# Altium PCB ESP32 With USB C 3rd PCB V1I1.PcbDoc (part 2 of 2)
Units mil, origin at the board's own origin, x right, y up, seen from the top; angles counter-clockwise.
Board outline 2700 x 1000 mil, 4 copper layers (L1, L2, L3, L4), stack 61.583 mil thick; 64 components, 73 nets, 299 pads, 161 vias.
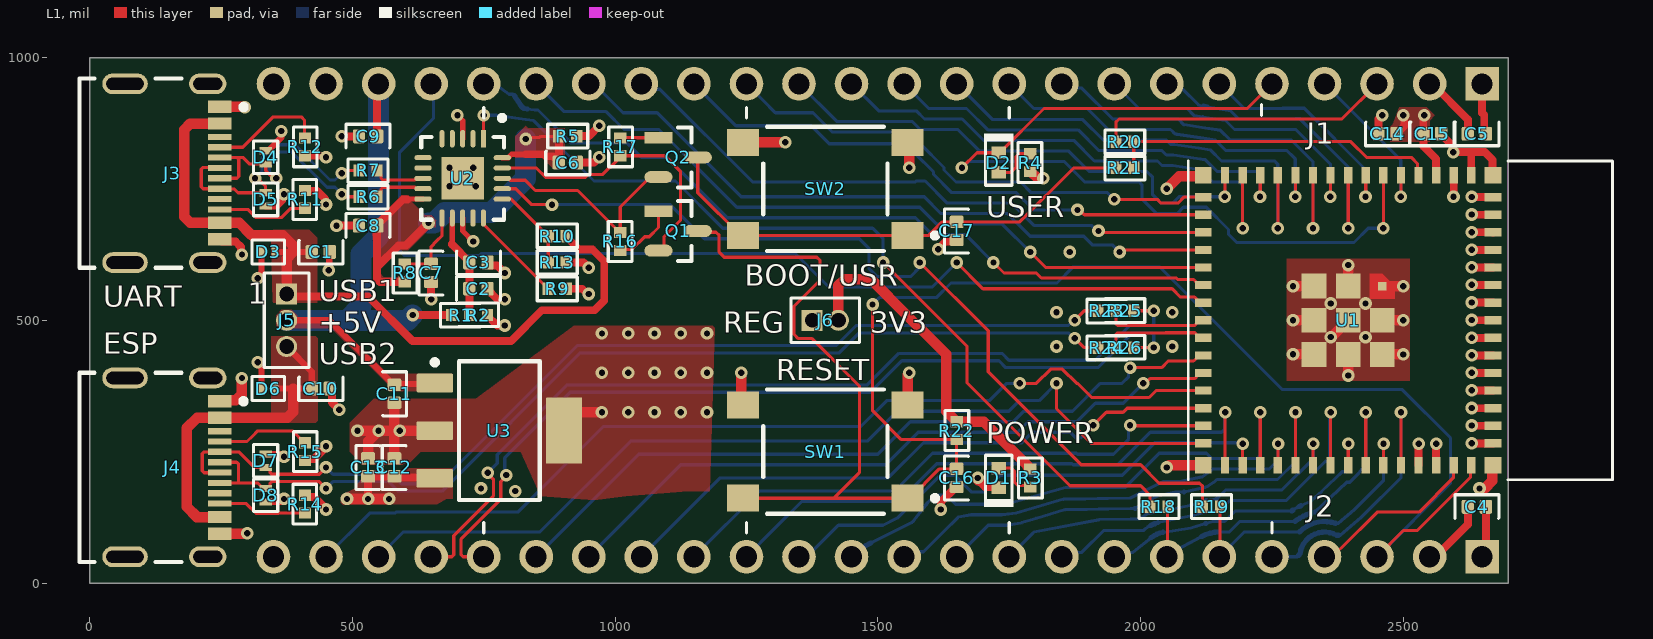
[diagram p0: L1 view]

## Via types
v1: diameter 24, hole 12, L1 to L4, tented both sides, 161 vias

## Nets (pads, with @x,y where several pads share a name; then routed paths per layer and width w, separated by ;. In a path a pad name is that pad's centre, name@x,y a point inside that pad or via, vN(x,y) a via of type N, cw(c..) or ccw(c..) an arc to the next point about the centre after c; other vN are vias at no path point) (continued)
GND: (continued)
  L1 w15: J3.B1A12 251.95,649.63 278.26,649.63 288.28,639.61 288.28,626.72 v1(290,625) ; R14.1 413.13,163.88 427.23,163.88 450,141.11 v1(450,140) ; R15.1 413.13,236.12 427.23,236.12 450,258.89 v1(450,260) ; R11.1 411.13,745.88 433.13,745.88 448.28,730.74 448.28,721.9 v1(450,720.18) ; R12.1 444.57,812.99 447.56,810 v1(450,810) ; C10.2 461.52,365.69 461.52,343.48 v1(475,330) ; v1(470,680) C8.2 ; v1(480,850) C9.2 ; v1(650,540) C7.2 ; C2.1 757.2,558.62 775.83,540 v1(790,540) ; C3.2 757.2,608.62 761.52,604.31 775.69,604.31 v1(790,590) ; R9.2 937.56,560 947.56,550 v1(950,550) ; R13.1 940,610 v1(950,600) ; C6.2 960,800 v1(970,810) ; v1(1615,635) 1615,636.13 1628.29,649.42 1646.62,649.42 C17.2 ; v1(1620,140) 1620,154.17 1648.62,182.8 C16.2 ; v1@1690.77,195.98 1703.72,183.03 D1.1@1728.27,183.03 ; C14.1 2452.8,882.8 v1(2460,890) ; U1.42 v1@2528.9,264.57 ; J2.2 2561.25,50 2622.8,111.54 C4.2 ; U1.43 v1@2562.36,264.57 ; C15.2 2572.2,853.62 2595,830.83 v1(2595,820) 2625,820 ; v1@2595.83,735.43 U1.2 ; U1.1 2629.29,815.71 2625,820 ; v1(2630.04,667.76) 2630.26,667.54 2670.41,667.54 U1.58 ; v1@2630.47,265.75 U1.46 ; v1@2630.47,299.21 U1.47 ; v1@2630.47,332.68 U1.48 ; v1@2630.47,366.14 U1.49 ; v1@2630.47,399.61 U1.50 ; v1@2630.47,433.07 U1.51 ; v1@2630.47,466.54 U1.52 ; v1@2630.47,500 U1.53 ; v1@2630.47,533.46 U1.54 ; v1@2630.47,566.93 U1.55 ; v1@2630.47,600.39 U1.56 ; v1@2630.47,633.86 U1.57 ; v1@2630.47,700.79 U1.59 ; v1@2630.47,734.25 U1.60 ; v1(2645,180) 2646.72,181.72 v1@2656.72,181.72 ; J1.1 2650,894.54 2653.85,890.69 2653.85,858.35 C5.2 ; U1.65@2669.25,223.03 U1.65 ; U1.62 2669.95,776.27 2669.95,805.05 2655,820 2625,820
  L1 w20: J4.B1A12 299.09,94.09 v1(300,95) ; J4.A1B12 249.45,347.87 278.28,347.87 290,359.59 v1(290,390) ; J3.A1B12 294.09,905.91 v1(295,905) ; v1(510,290) v1(550,290) ; C13.1 530,270 v1(550,290) ; C12.1 580,278.92 ; 580,301.08 C11.1 ; U3.2 v1(590,290) v1(550,290) ; U3.4 903.03,300.55 927.48,325 v1(975,325) ; v1(1240,400) 1240,342.09 SW1.4 ; SW2.4 v1(1323.58,838.58) ; SW1.3 1556.5,396.5 v1(1560,400) ; SW2.3 1560,835.08 v1(1560,790) ; v1(1690,200) 1690.77,199.23 v1@1690.77,195.98 ; D1.1@1728.27,183.03 D1.1 ; v1(2050,220) 2054.41,224.41 U1.64 ; v1(2050,750) 2073.7,773.7 2117.56,773.7 U1.63 ; v1(2290,435.08) U1.73@2330.04,435.08 ; v1(2290,500.04) U1.72@2330.04,500.04 ; v1(2290,565) 2330.04,565 U1.71 ; v1(2362,468) 2363.04,468 U1.61 ; v1(2395,394.96) U1.70 ; U1.69@2395.08,565 v1(2395.08,605.04) ; U1.68 v1(2500.08,435) ; U1.67 v1(2500.08,499.96) ; U1.66@2460.04,564.92 v1(2500.08,564.92) ; v1@2656.72,181.72 2669.25,194.25 U1.65@2669.25,223.03
  other v1: 810,175 745,180 2529.33,265 2562.8,265 2630.04,266.18 2630.04,299.65 1025,325 1075,325 1125,325 1175,325 2630.04,333.11 2630.04,366.57 975,400 1025,400 1075,400 1125,400 1175,400 2630.04,400.04 2630.04,433.5 1840,450 2060,450 2630.04,466.97 2428,468 975,475 1025,475 1075,475 1125,475 1175,475 2630.04,500.43 1840,515 2060,515 2362,532 2428,532 2630.04,533.9 2630.04,567.36 2630.04,600.83 1865,630 2630.04,634.29 2630.04,701.22 2595.39,735 2630.04,734.69 685,755 735,755 685,790 730,790
GPIO0: R20.2 R21.2 U1.4 | length 630.6
  L1 w6: R21.2 R20.2 2400,840 2430,810 2515,810 2526.74,798.26 2526.74,777.75 U1.4
GPIO1: J1.4 U1.5 | length 315.8
  L1 w6: v1(2495,735) 2495.43,735.43 U1.5
  L4 w6: J1.4 2495,805 v1(2495,735)
GPIO2: D2.1 J1.5 U1.6 | length 1669.8
  L1 w6: v1(1660,790) 1688.7,818.7 D2.1 1731.97,818.7 1816.27,903 2203,903 J1.5 ; v1@2461.97,675.04 U1.6
  L4 w6: v1(1660,790) 1660.5,790 1672.86,802.36 1854.36,802.36 1893.72,763 1997.14,763 2003,757.14 2003,730.53 2030.53,703 2069.47,703 2081.47,715 2125,715 2167.21,672.79 2167.21,663.82 2183.03,648 2406.18,648 2433.18,675 v1(2461.93,675)
GPIO3: J1.6 U1.7 | length 438.2
  L1 w6: v1@2428.5,735.43 U1.7
  L4 w6: J1.6 2197,903 2269.47,903 2270.02,903.56 2311.44,903.56 2428.07,786.93 v1(2428.07,735)
GPIO4: J1.7 U1.8 | length 624.8
  L1 w6: v1(2395,675) v1(2395,675) U1.8
  L4 w6: J1.7 2060.33,939.67 2080.33,939.67 2108.48,911.52 2110.53,909.47 2113.36,908.84 2119.53,907.45 ; 2127.56,905.92 2167.57,899.71 2170.79,899.21 2187,883 2277.75,883 2294.88,883.56 2303.16,883.56 2306.09,880.63 2395,791.72 v1(2395,675)
  L4 w10: 2119.53,907.45 ccw(c2146.23,1026.12) 2127.56,905.92
GPIO5: J1.8 U1.9 | length 573.8
  L1 w6: v1@2361.57,735.43 U1.9
  L4 w6: J1.8 1994.07,905.93 1997,903 2088.72,903 2102.24,889.47 2118.18,887.14 2161.27,880.45 2163.58,878.14 2178.72,863 2295.43,863 2358.21,800.22 2361.14,797.29 v1(2361.14,735)
GPIO6: J1.9 U1.10 | length 763.1
  L1 w6: v1(2328.07,675) U1.10
  L4 w6: J1.9 1858.23,941.77 1888.23,941.77 1947,883 2071.56,883 2082.39,872.18 2116.64,867.14 2151.75,861.69 2170.43,843 2286.59,843 2289.52,840.07 2328.07,801.52 v1(2328.07,675)
GPIO7: J1.10 U1.11 | length 711.7
  L1 w6: v1@2294.65,735.43 U1.11
  L4 w6: J1.10 1797,903 1898.72,903 1938.72,863 2057,863 2059.93,860.07 2063.22,856.78 2065.56,854.44 2068.84,853.96 2113.66,847.36 2142.22,842.92 2162.15,823 2278.31,823 2291.28,810.02 2294.21,807.09 v1(2294.21,735)
GPIO8: J1.11 U1.12 | length 893.7
  L1 w6: v1@2261.18,675.04 U1.12
  L4 w6: J1.11 1717.64,882.36 1889.36,882.36 1928.72,843 2048.72,843 2057.28,834.44 2064.1,834.44 2110.65,827.59 2132.7,824.16 2153.86,803 2255.28,803 2258.21,800.07 2261.14,797.14 v1(2261.14,675)
GPIO9: J1.12 U1.13 | length 828.1
  L1 w6: v1@2227.72,735.43 U1.13
  L4 w6: J1.12 1597,903 1668.72,903 1709.36,862.36 1881.07,862.36 1920.43,823 2040.43,823 2048.99,814.44 2062.63,814.44 2107.67,807.81 2123.17,805.4 2145.58,783 2221.43,783 2224.35,780.07 2227.28,777.14 v1(2227.28,735)
GPIO10: J1.13 U1.14 | length 1004.1
  L1 w6: v1@2194.25,675.04 U1.14
  L4 w6: J1.13 1501.64,898.36 1573.36,898.36 1588.72,883 1660.43,883 1701.07,842.36 1872.79,842.36 1912.15,803 2032.15,803 2040.71,794.44 2061.17,794.44 2104.69,788.03 2113.65,786.64 2137.29,763 2188.35,763 2191.28,760.07 2194.21,757.14 v1(2194.21,675)
GPIO11: J1.14 U1.15 | length 968.9
  L1 w6: v1@2160.79,735.43 U1.15
  L4 w6: J1.14 1421.64,878.36 1565.07,878.36 1580.43,863 1652.15,863 1692.79,822.36 1862.64,822.36 1902,783 2012,783 2023,772 2023,738.82 2038.82,723 2061.18,723 2073.18,735 v1(2160.35,735)
GPIO12: J1.15 U1.16 | length 974.7
  L1 w6: v1(1950,730) 2031.82,730 2038.82,723 2071.22,723 2082.48,734.25 U1.16
  L4 w6: J1.15 1258.23,941.77 1264.75,941.77 1267.68,938.84 1267.64,938.8 1267.64,932.36 1280.65,919.35 1305,895 1376.72,895 1413.36,858.36 1529.83,858.36 1532.25,855.93 1559.22,855.93 1578.15,837 1579.47,837 1625.86,790.61 1625.86,785.96 1648.82,763 1772,763 1792,743 1937,743 v1(1950,730)
GPIO13: J1.16 U1.17 | length 1075.4
  L1 w6: v1(1880,710) 1883.79,710 1893,700.79 U1.17
  L4 w6: J1.16 1230,870 1373.43,870 1407.5,835.93 1550.93,835.93 1569.86,817 1571.18,817 1605.86,782.33 1605.86,777.67 1640.53,743 1763.72,743 1796.72,710 v1(1880,710)
GPIO14: J1.17 U1.18 | length 1188.2
  L1 w6: v1(1920,670) 1922.68,667.32 U1.18
  L4 w6: J1.17 1060.33,939.67 1085.33,939.67 1262,763 1571.18,763 1573.18,765 1590,765 1632,723 1755,723 1798,680 1907.14,680 1917.14,670 v1(1920,670)
GPIO15: J1.18 U1.19 | length 1303.6
  L1 w6: v1(1960,630) 1963.86,633.86 U1.19
  L4 w6: J1.18 960,950 1015.03,894.97 1080.03,894.97 1081.26,893.74 1240,735 1588.28,735 1620.28,703 1746.72,703 1789.72,660 1891.82,660 1908.82,643 1947,643 v1(1960,630)
GPIO16: J1.19 U1.20 | length 1414.3
  L1 w6: v1(1790,630) 1819.61,600.39 U1.20
  L4 w6: J1.19 903,897 983,897 1017,863 1083.72,863 1231.72,715 1580,715 1612,683 1737,683 v1(1790,630)
GPIO17: J1.20 U1.21 | length 1528
  L1 w6: v1(1720,610) 1740,590 1801.72,590 1811.32,580.39 2067.89,580.39 2070.76,577.52 2100.98,577.52 2108.7,569.8 2116.57,569.8 U1.21
  L4 w6: J1.20 757.78,951 769.88,951 798.56,930 805.68,930 808.6,927.07 809.47,926.21 ; 822.58,906.22 823.13,905.66 ; 827.74,903.04 831.4,902.11 832.78,901.92 846.4,900 853.28,900 916.28,837 1023,837 1050,810 1098.28,810 1213.28,695 1571.72,695 1603.72,663 1667,663 v1(1720,610)
  L4 w10: 809.47,926.21 ccw(c1016.65,1047.81) 822.58,906.22 ; 823.13,905.66 ccw(c830.2,912.74) 827.74,903.04
GPIO18: J1.21 U1.22 | length 1959.7
  L1 w6: v1(1650,610) 1700,560 2060,560 2075.94,544.06 2102.84,544.06 2108.7,538.2 2108.7,536.34 2111.57,533.46 U1.22
  L4 w6: J1.21 654.47,945.53 654.47,884.47 590,820 590,650 590,632.86 599.86,623 741.18,623 745.18,627 1343,627 1407,563 1603,563 1603.33,563.33 v1(1650,610)
GPIO21: J2.19 U1.25 | length 1436.8
  L1 w6: v1(1980,410) 2040,410 2052.48,422.48 2100.98,422.48 2108.7,430.2 2116.57,430.2 U1.25
  L4 w6: J2.19 1045,245 1500,245 1562,307 1757.4,307 1777.4,327 1870.53,327 1923.53,380 1964.75,380 1977.32,392.58 1977.32,407.32 v1(1980,410)
GPIO26: J2.18 U1.26 | length 1315.3
  L1 w6: v1(2005,380) 2008.79,380 2017.8,389.02 2102.84,389.02 2108.7,394.87 2108.7,396.73 2111.57,399.61 U1.26
  L4 w6: J2.18 1125,225 1515,225 1577,287 1765.68,287 1785.68,307 1878.82,307 1913.98,342.16 1967.16,342.16 v1(2005,380)
GPIO33: J2.17 U1.28 | length 1195.9
  L1 w6: v1(1910,300) 1935,325 1966.82,325 1974.49,332.68 U1.28
  L4 w6: J2.17 1105,105 1200,200 1520,200 1587,267 1773.96,267 1793.96,287 1866.04,287 1877.38,275.66 1885.66,275.66 v1(1910,300)
GPIO34: J2.16 U1.29 | length 1088.7
  L1 w6: v1(1980,300) 1980.79,299.21 U1.29
  L4 w6: J2.16 1274.85,174.85 1531.82,174.85 1603.96,247 1877.75,247 1879.75,245 1948.43,245 1977.32,273.89 1977.32,297.32 v1(1980,300)
GPIO35: J2.15 U1.31 | length 1145.3
  L1 w6: U1.31 v1(2160.83,325)
  L4 w6: J2.15 1301.17,101.17 1354.85,154.85 1455.09,154.85 1540.1,154.85 1543.03,157.78 1612.25,227 1869.47,227 1871.47,225 1956.72,225 2018.72,287 2154.14,287 2160,292.86 2160,324.17 v1(2160.83,325)
GPIO36: J2.14 U1.32 | length 999.6
  L1 w6: U1.32 v1@2194.25,264.57
  L4 w6: J2.14 1365,50 1425,110 1509.79,110 1536.99,123.46 1618.53,205 1646.82,205 1678.82,173 1701.18,173 1733.18,205 1965,205 2027,267 2192.69,267 v1(2194.69,265)
GPIO37: J2.13 U1.33 | length 1050.6
  L1 w6: U1.33 v1@2227.72,324.96
  L4 w6: 1486.39,76.11 1564.7,114.85 1566.09,116.24 1568.21,118.66 1594.58,152.76 1608.82,167 1631.18,167 1648.18,150 1728.3,150 1738.97,153 1755.1,153 1856.9,181.62 1970,181.62 2035.38,247 2125.36,247 2135.36,237 2221.9,237 2227.76,242.86 v1(2227.76,325) v1@2230,322.76
  L4 w10: J2.13 cw(c1547.58,-47.58) 1486.39,76.11
GPIO38: J2.12 U1.34 | length 839.2
  L1 w6: U1.34 v1@2261.18,264.57
  L4 w6: J2.12 1559.46,59.46 1587.01,59.46 1626.84,99.28 1650.91,123.36 1653.13,125.57 1677.67,130 1736.58,130 1763.39,133 1853.18,159.46 1980.89,161.62 2041.21,191.94 2043.33,193 2074.43,193 2117.51,202.28 2132.41,212.46 2136.95,217 2245,217 2261.61,233.61 v1(2261.61,265)
GPIO39: J2.11 U1.35 | length 895.2
  L1 w6: U1.35 v1@2294.65,324.96
  L4 w6: J2.11 1710,110 1744.87,110 1772.57,113.9 1773.93,115.26 1800.87,123.19 1856.23,139.51 1981.06,141.62 1985.63,141.62 1989.31,141.76 ; 1989.33,141.77 2006.68,152.17 2007,152.36 2034.83,166.34 2065.72,173 2082.72,173 ; 2082.73,173 2123.65,182.28 2127.49,183.97 2140.7,192.46 2145.24,197 2260.58,197 2294.69,231.11 v1(2294.69,325)
GPIO40: J2.10 U1.36 | length 707
  L1 w6: U1.36 v1@2328.11,264.57
  L4 w6: J2.10 1794.94,94.94 1797.12,97.12 1921.05,120.46 1921.88,120.62 1981.23,121.62 1993.92,121.62 1997.6,121.76 2011.9,131.31 2094.47,147.89 2097.69,148.58 2097.87,148.63 2123.16,155.03 2125.12,157 ; 2125.13,157 2144.64,159.93 2144.79,160.08 2161.72,177 2268.86,177 2328.54,236.68 v1(2328.54,265)
GPIO41: J2.9 U1.37 | length 767.6
  L1 w6: U1.37 v1(2361.61,325)
  L4 w6: J2.9 1858.23,58.23 1888.23,58.23 1930,100 2005.28,100 2008.03,102.23 2013.33,106.52 2019.54,109.68 ; 2027.15,112.98 2033.17,115.18 ; 2033.2,115.18 2098.53,128.31 2102.24,129.1 2133.41,137 2150,137 2170,157 2277.15,157 2351.79,231.64 2354.14,231.64 2360,237.5 2360,323.39 v1(2361.61,325)
  L4 w10: 2019.54,109.68 cw(c2050,50) 2027.15,112.98
GPIO42: J2.8 U1.38 | length 588.7
  L1 w6: U1.38 v1@2395.04,264.57
  L4 w6: J2.8 1958.23,58.23 1985.5,58.23 2020.42,86.52 ; 2042.67,96.42 2095.99,104.77 2123.31,113.05 ; 2124.18,113.3 2136.9,117 2138.32,117 2160,117 2162.93,119.93 2180,137 2287.26,137 ; 2289.45,138.27 2296.93,143.1 2302.1,145.68 ; 2305.11,147.13 2325,156.32 2345.05,175.05 2383.83,211.64 2389.61,211.64 2395.47,217.5 v1(2395.47,265)
  L4 w10: 2020.42,86.52 cw(c2050,50) 2042.63,96.42 ; 2123.31,113.05 cw(c2150,24.92) 2124.18,113.3 ; 2287.26,137 cw(c2314.15,93.12) 2289.45,138.27 ; 2302.1,145.68 cw(c2350,50) 2305.11,147.13
GPIO45: J2.5 U1.41 | length 539.6
  L1 w6: U1.41 v1@2495.43,324.96
  L4 w6: J2.5 2298.03,50 2300.95,52.93 2303.3,55.27 ; 2373.4,90.76 2375.93,90.76 2380.01,90.76 2420,125 2422.93,127.93 2495.47,200.47 v1(2495.47,325)
  L4 w10: 2303.3,55.27 cw(c2350,50) 2373.4,90.76
GPIO46: J2.4 U1.44 | length 331.9
  L1 w6: J2.4 2364.61,50 2380.35,65.73 2380.73,65.73 2450,135 2530,135 2595.2,200.2 2595.2,223.78 U1.44
GPIO47: J2.23 U1.27 | length 1845.1
  L1 w6: v1(1770,380) 1801.82,380 1828.82,407 1851.18,407 1878.18,380 1880,380 1907,353 2016.18,353 2029.33,366.14 U1.27
  L4 w6: J2.23 533,133 581.18,133 583.18,135 815,135 978,298 1468,298 1517,347 1712,347 1745,380 v1(1770,380)
GPIO48: J2.22 U1.30 | length 1781.7
  L1 w6: v1(1840,380) 1840,331.82 1906.07,265.75 U1.30
  L4 w6: J2.22 597,97 857,97 1030,270 1480,270 1537,327 1749.11,327 1769.11,347 1807,347 v1(1840,380)
NetD1_2: D1.2 R3.1 | length 85.2
  L1 w6: D1.2@1731.97,218.7 1754.14,218.7 1760,212.84 1760,191.68 1765.86,185.82 1787.17,185.82 R3.1
NetD2_2: D2.2 R4.1 | length 86.3
  L1 w6: D2.2 1752.92,781.31 1763.19,791.58 1763.19,811.15 1769.05,817.01 R4.1
NetJ3_A5: J3.A5 R12.2 | length 222.2
  L1 w6: J3.A5 291.8,829.13 349.66,887 402.96,887 408.82,881.14 408.82,848.19 R12.2
NetJ3_B5: J3.B5 R11.2 | length 176.2
  L1 w6: J3.B5 301.27,711.02 316.98,695.31 365.01,695.31 382.69,712.99 R11.2
NetJ4_A5: J4.A5 R15.2 | length 180.1
  L1 w6: J4.A5 299.72,269.29 310,279.57 320,289.57 386.26,289.57 408.82,267.01 R15.2
NetJ4_B5: J4.B5 R14.2 | length 170.3
  L1 w6: J4.B5 298.31,151.18 316.98,132.52 359.85,132.52 360.32,132.99 R14.2
NetQ1_1: Q1.1 R16.2 | length 121.5
  L1 w6: R16.2 1011.97,634.96 1032.34,634.96 1056.24,658.87 1064.94,658.87 1082.58,676.5 Q1.1
NetQ2_1: Q2.1 R17.2 | length 72.7
  L1 w6: R17.2 1010.2,847.2 1082.38,847.2 Q2.1
NetR9_1: R9.1 U2.15 | length 186.7
  L1 w6: U2.15 749.37,683.28 865.84,566.81 867.36,566.81 872.99,561.18 R9.1
RTS_FTDI: Q1.2 R17.1 U2.19 | length 548.6
  L1 w6: U2.19 830,789.68 850.32,789.68 868.19,771.81 943.5,771.81 949.19,777.5 976.86,777.5 1003.19,803.82 1003.19,807.36 1008.82,812.99 R17.1 1094.78,812.99 1124.29,783.48 1124.29,689.93 1093.23,658.86 1093.23,638.38 1087.44,632.6 Q1.2
RXD_FTDI: R18.2 U2.1 | length 1697.9
  L1 w6: U2.1 749.6,845.64 749.6,889.6 v1(750,890) ; v1(1510,610) 1670,450 1670,380.66 1865.66,185 2000,185 2017.99,167.01 R18.2
  L4 w6: v1(750,890) 774.03,890 830,882.11 845,880 960,765 1115,765 1205,675 1490,675 1510,655 v1(1510,610)
TXD_FTDI: R19.2 U2.17 | length 1702.1
  L1 w6: U2.17 810.96,750.32 830,731.28 841.28,720 v1(880,720) ; v1(1580,610) 1710,480 1710,401.82 1886.82,225 2000,225 2035,190 2112.13,190 2117.99,184.14 R19.2
  L4 w6: v1(880,720) 1105,720 1170,655 1465,655 1483,637 1483,598.82 1498.82,583 1562.14,583 1580,600.86 v1(1580,610)
U0RXD: J2.6 R19.1 U1.40 | length 575.7
  L1 w6: J2.6 2151,51 2151,144 R19.1 ; U1.40 v1@2461.97,264.57
  L4 w6: J2.6 2197,97 2298.23,97 2302.25,97 2302.63,97.38 ; 2370.8,113.69 2376.03,113.69 2406.41,139.69 2462.4,195.69 v1(2462.4,265)
  L4 w10: 2302.63,97.38 cw(c2350,50) 2370.8,113.69
U0TXD: J2.7 R18.1 U1.39 | length 738.3
  L1 w6: J2.7 2051,51 2051,144 R18.1 ; U1.39 v1(2428.54,325)
  L4 w6: J2.7 2060,50 2078.73,68.73 2116.19,88.58 ; 2150,97 2168.72,97 2170.13,98.41 2188.72,117 2289.9,117 2294.03,117.31 ; 2299.61,121.02 2302.82,123.1 ; 2331.48,135.01 2392.11,191.64 2397.9,191.64 2415.47,209.22 2428.54,226.54 v1(2428.54,325)
  L4 w10: 2116.22,88.6 cw(c2150,24.92) 2150,97 ; 2294.03,117.31 cw(c2314.15,93.12) 2299.61,121.02 ; 2302.82,123.1 cw(c2350,50) 2331.48,135.01
VBUS_SENSE: R10.2 R13.2 U2.16 | length 168.7
  L1 w6: U2.16 802.36,730.63 830,702.99 866.18,666.81 867.36,666.81 R10.2@872.99,661.18 ; R13.2 R10.2@872.99,661.18 ; R10.2 R10.2@872.99,661.18
pads on no net: J1.24 J3.A8 J3.B8 J4.A8 J4.B8 U2.2 U2.4 U2.5 U2.6 U2.7 U2.14

## Polygon pours and split planes (outlines as drawn)
GND on L1 "GND_L01_P009" (solid, pour order 9): 1180,175 1190,490 921,490 734.64,351 541,351 495,305 495,250 520,225 605,225 630,250 821.01,250 858.14,165 960.4,157.65 1020,165 1140,175
GND on L1 "GND_L01_P008" (solid, pour order 8): 2278,617 2512,617 2512,385 2278,385
+5V_VBUS2 on L1 "+5V_VBUS2_L01_P007" (solid, pour order 7): 346,470 430,470 434,466 434,309 430,305 346,305
+5V_VBUS1 on L1 "+5V_VBUS1_L01_P006" (solid, pour order 6): 348.5,536.5 350,533 433,533 433,657 418,672 345,672
+5V on L1 "+5V_L01_P005" (solid, pour order 5): 690,365 690,398 567,398 460,505 395,505 395,510 385,520 365,520 355,510 355,490 365,481.5 383.5,481.5 390,485 460,485 567,378 567,368 570,365
+3V3_REG on L1 "+3V3_REG_L01_P004" (solid, pour order 4): 690.93,218 690.93,160 680,160 662,150 478,148 480,168 506,180 510,190 517,197 517,215 600,215 603,218
+3V3_FTDI on L1 "+3V3_FTDI_L01_P003" (solid, pour order 3): 606,565 553.23,566.77 549,571 535,693 549,693 594,738 605,738 605,734 639,700 655,700 655,695 660,690 659,689 659,676.8 648.67,674.73 606,633 588,633 548.5,593.5 560,582 585,582 587,584 613,584
+3V3_FTDI on L1 "+3V3_FTDI_L01_P002" (solid, pour order 2): 904,865 904,788 882,788 861,809 810,809 810,850 830,870 835,865
+3V3 on L1 "+3V3_L01_P001" (solid, pour order 1): 2475,868 2475,840 2550,840 2550,880 2560,890 2545,905 2492.07,905 2479.89,872.89
GND on L2 "GND_L02_P012" (solid, remove dead copper, pour order 12): 15.94,15.8 2675.8,15.8 2680,20 2680,980 20,980 20,20
+3V3_REG on L2 "+3V3_REG_L02_P011" (solid, pour order 11): 478,140 695,140 695,225 478,225
+3V3 on L2 "+3V3_L02_P010" (solid, pour order 10): 2680,20 2680,980 920,980 920,840 1220,840 1360,700 1360,614 1406,568 1406,494 1418,482 1460,482 1460,680 1820,680 1820,700 1880,760 2000,760 2020,780 2100,780 2120,760 2520,760 2540,740 2540,440 2580,400 2540,360 2520,360 2520,180 2320,180 2320,20
GND on L3 (split plane): 2699.95,0.05 0.05,0.05 0.05,999.95 2699.95,999.95

## Silkscreen, mask and mechanical layers (free items; w line width, h text height)
Top Overlay:
  lines w6: 750,95 750,115 ; 750,885 750,905 ; 1250,95 1250,115 ; 1250,885 1250,905 ; 1750,95 1750,115 ; 1750,885 1750,905 ; 2230,890 2230,910 ; 2250,95 2250,115
  text "J1" at 2316,836 h40
  text "USER" at 1706,696 h40
  text "BOOT/USR" at 1246.72,566 h40
  text "USB1" at 436,536 h40
  text "UART" at 26,526 h40
  text "+5V" at 436,476 h40
  text "REG" at 1206,476 h40
  text "3V3" at 1486,476 h40
  text "ESP" at 26,436 h40
  text "USB2" at 436,416 h40
  text "RESET" at 1306.7,386 h40
  text "POWER" at 1706,266 h40
  text "J2" at 2316,126 h40
Bottom Overlay:
  text "NC" at 370,879 h40 r90
  text "GND" at 470,879 h40 r90
  text "5V" at 570,879 h40 r90
  text "018" at 670,879 h40 r90
  text "017" at 770,879 h40 r90
  text "016" at 870,879 h40 r90
  text "015" at 970,879 h40 r90
  text "014" at 1070,879 h40 r90
  text "013" at 1170,879 h40 r90
  text "012" at 1270,879 h40 r90
  text "011" at 1370,879 h40 r90
  text "O10" at 1470,879 h40 r90
  text "109" at 1570,879 h40 r90
  text "108" at 1670,879 h40 r90
  text "107" at 1770,879 h40 r90
  text "106" at 1870,879 h40 r90
  text "105" at 1970,879 h40 r90
  text "104" at 2070,879 h40 r90
  text "IO3" at 2170,879 h40 r90
  text "I02" at 2270,879 h40 r90
  text "I01" at 2370,879 h40 r90
  text "I00" at 2470,879 h40 r90
  text "3V3" at 2570,879 h40 r90
  text "GND" at 2670,879 h40 r90
  text "<---PIN1--->" at 2670,742 h40 r90
  text "MADE IN SPAIN AND KENYA" at 2238,637 h70
  text "BY ANTHONY KIRANGA NDIRITU" at 2338,537 h70
  text "C(2025) ANTHONY" at 1864,396 h40
  text "ESP32_WITH-USB_C" at 1879,317.66 h40
  text "GND" at 370,265 h40 r90
  text "IO47" at 470,265 h40 r90
  text "IO48" at 570,265 h40 r90
  text "USB-" at 670,265 h40 r90
  text "USB+" at 770,265 h40 r90
  text "IO21" at 870,265 h40 r90
  text "IO26" at 970,265 h40 r90
  text "IO33" at 1070,265 h40 r90
  text "IO34" at 1170,265 h40 r90
  text "IO35" at 1270,265 h40 r90
  text "IO36" at 1370,265 h40 r90
  text "IO37" at 1470,265 h40 r90
  text "IO38" at 1570,265 h40 r90
  text "IO39" at 1670,265 h40 r90
  text "IO40" at 1770,265 h40 r90
  text "IO41" at 1870,265 h40 r90
  text "IO42" at 1970,265 h40 r90
  text "TXD" at 2070,265 h40 r90
  text "RXD" at 2170,265 h40 r90
  text "IO45" at 2270,265 h40 r90
  text "IO46" at 2370,265 h40 r90
  text "EN" at 2470,265 h40 r90
  text "GND" at 2570,265 h40 r90
  text "3V3" at 2670,265 h40 r90
Board Shape:
  the board outline again, w20

## Text inside footprints (layer, text, board x,y; h text height)
J1: Bottom Overlay "1" at 2626,1021 h40 r270
J2: Bottom Overlay "1" at 2626,-35 h40 r270
J5: Top Overlay "1" at 301,531 h40